# Altium PCB PCB.PcbDoc
Units mm, origin at the board's own origin, x right, y up, seen from the top; angles counter-clockwise.
Board outline 100 x 100 mm, 4 copper layers (Top Layer, Layer2, Layer3, Bottom Layer), stack 1.482 mm thick; 33 components, 28 nets, 172 pads, 8 vias.
Unrouted connection lines stored in the file: 71.
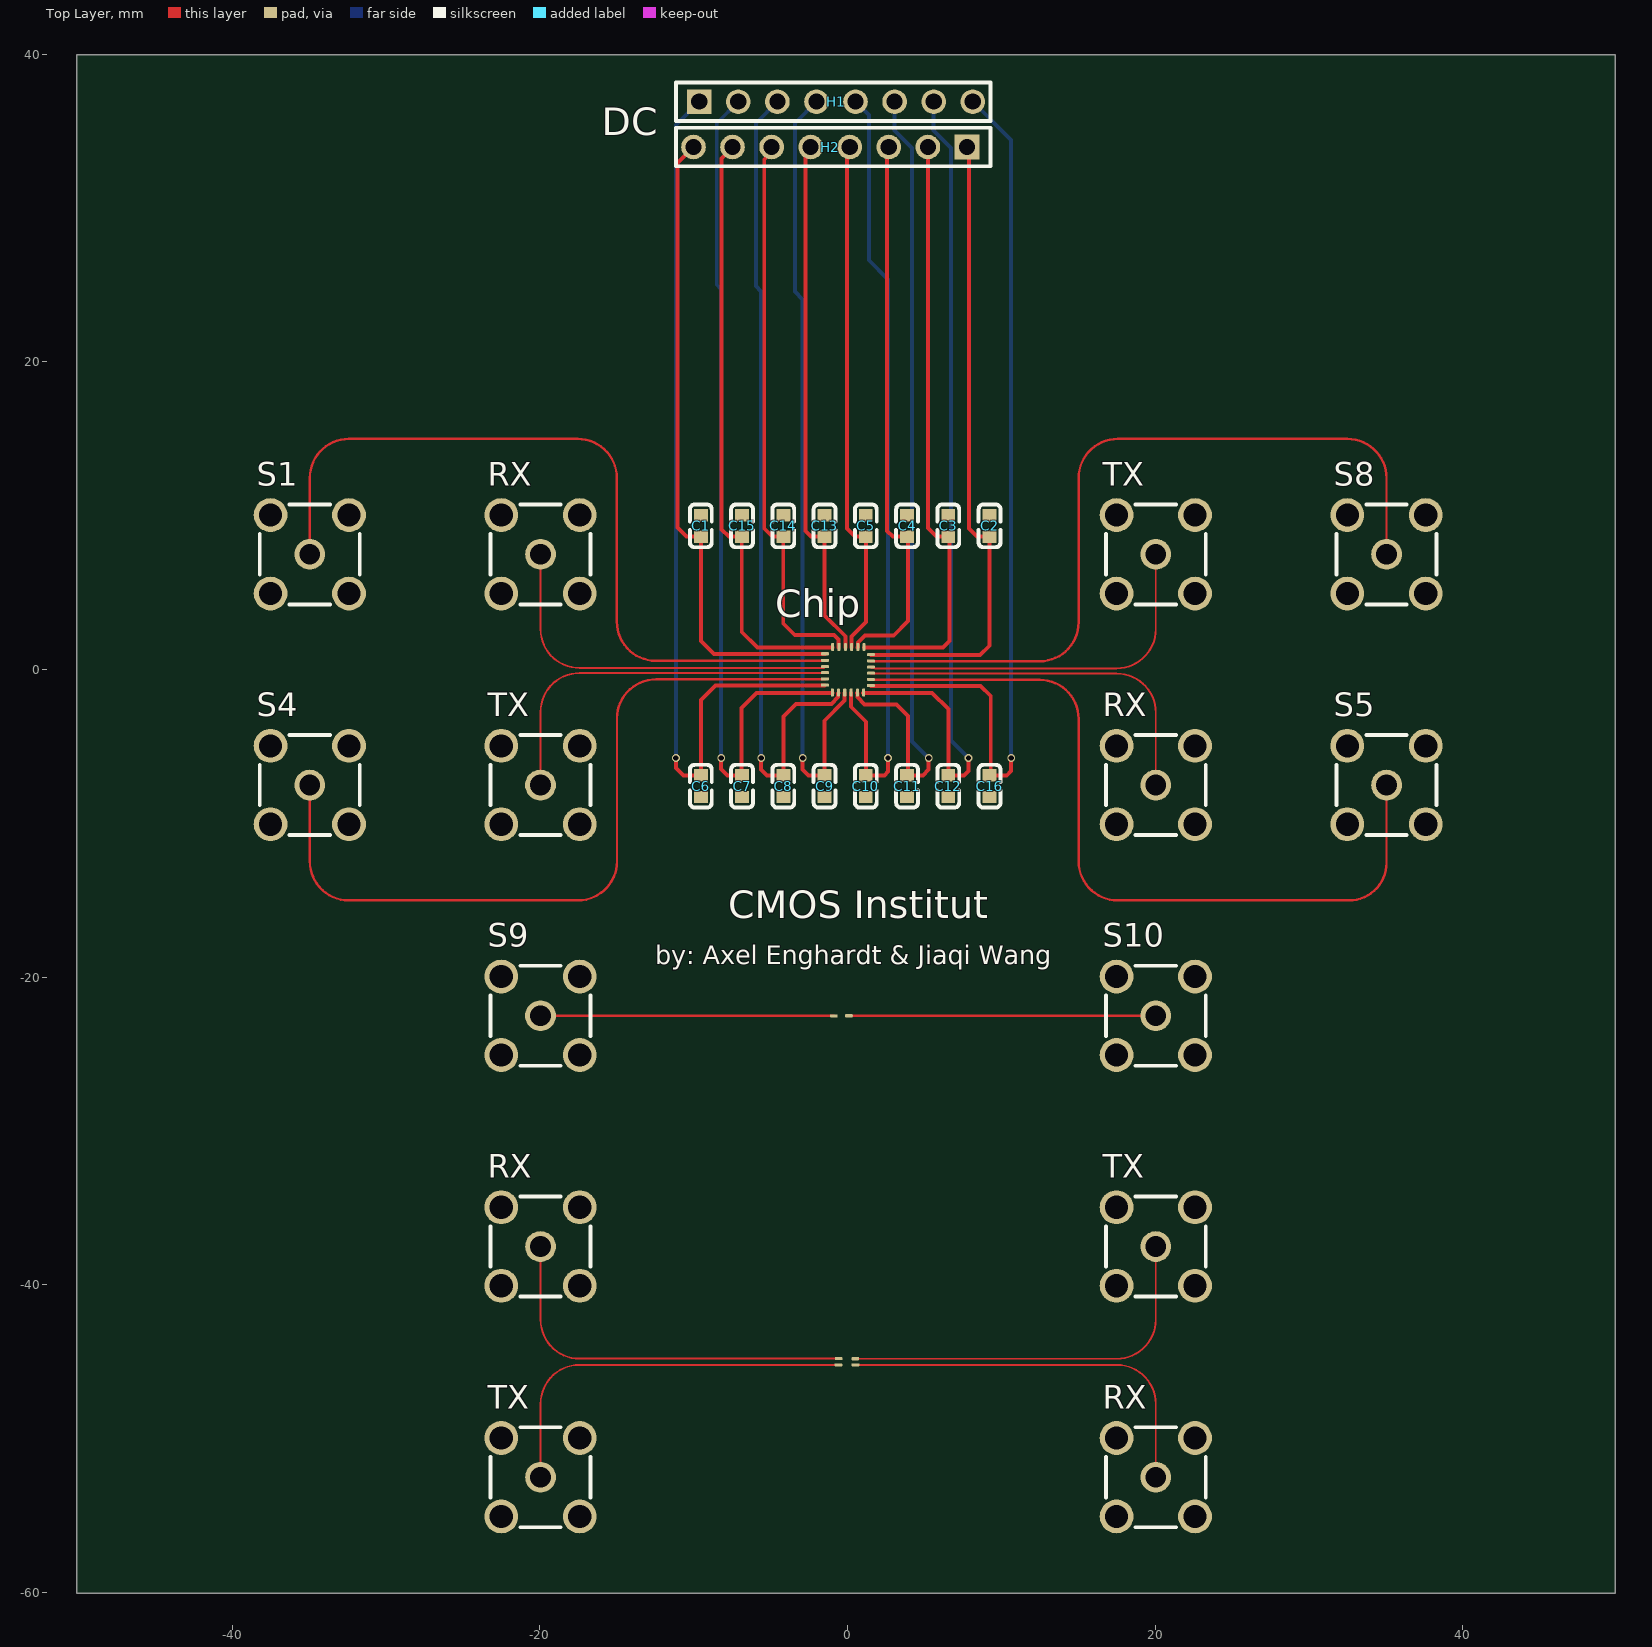
[diagram p0: Top Layer view]
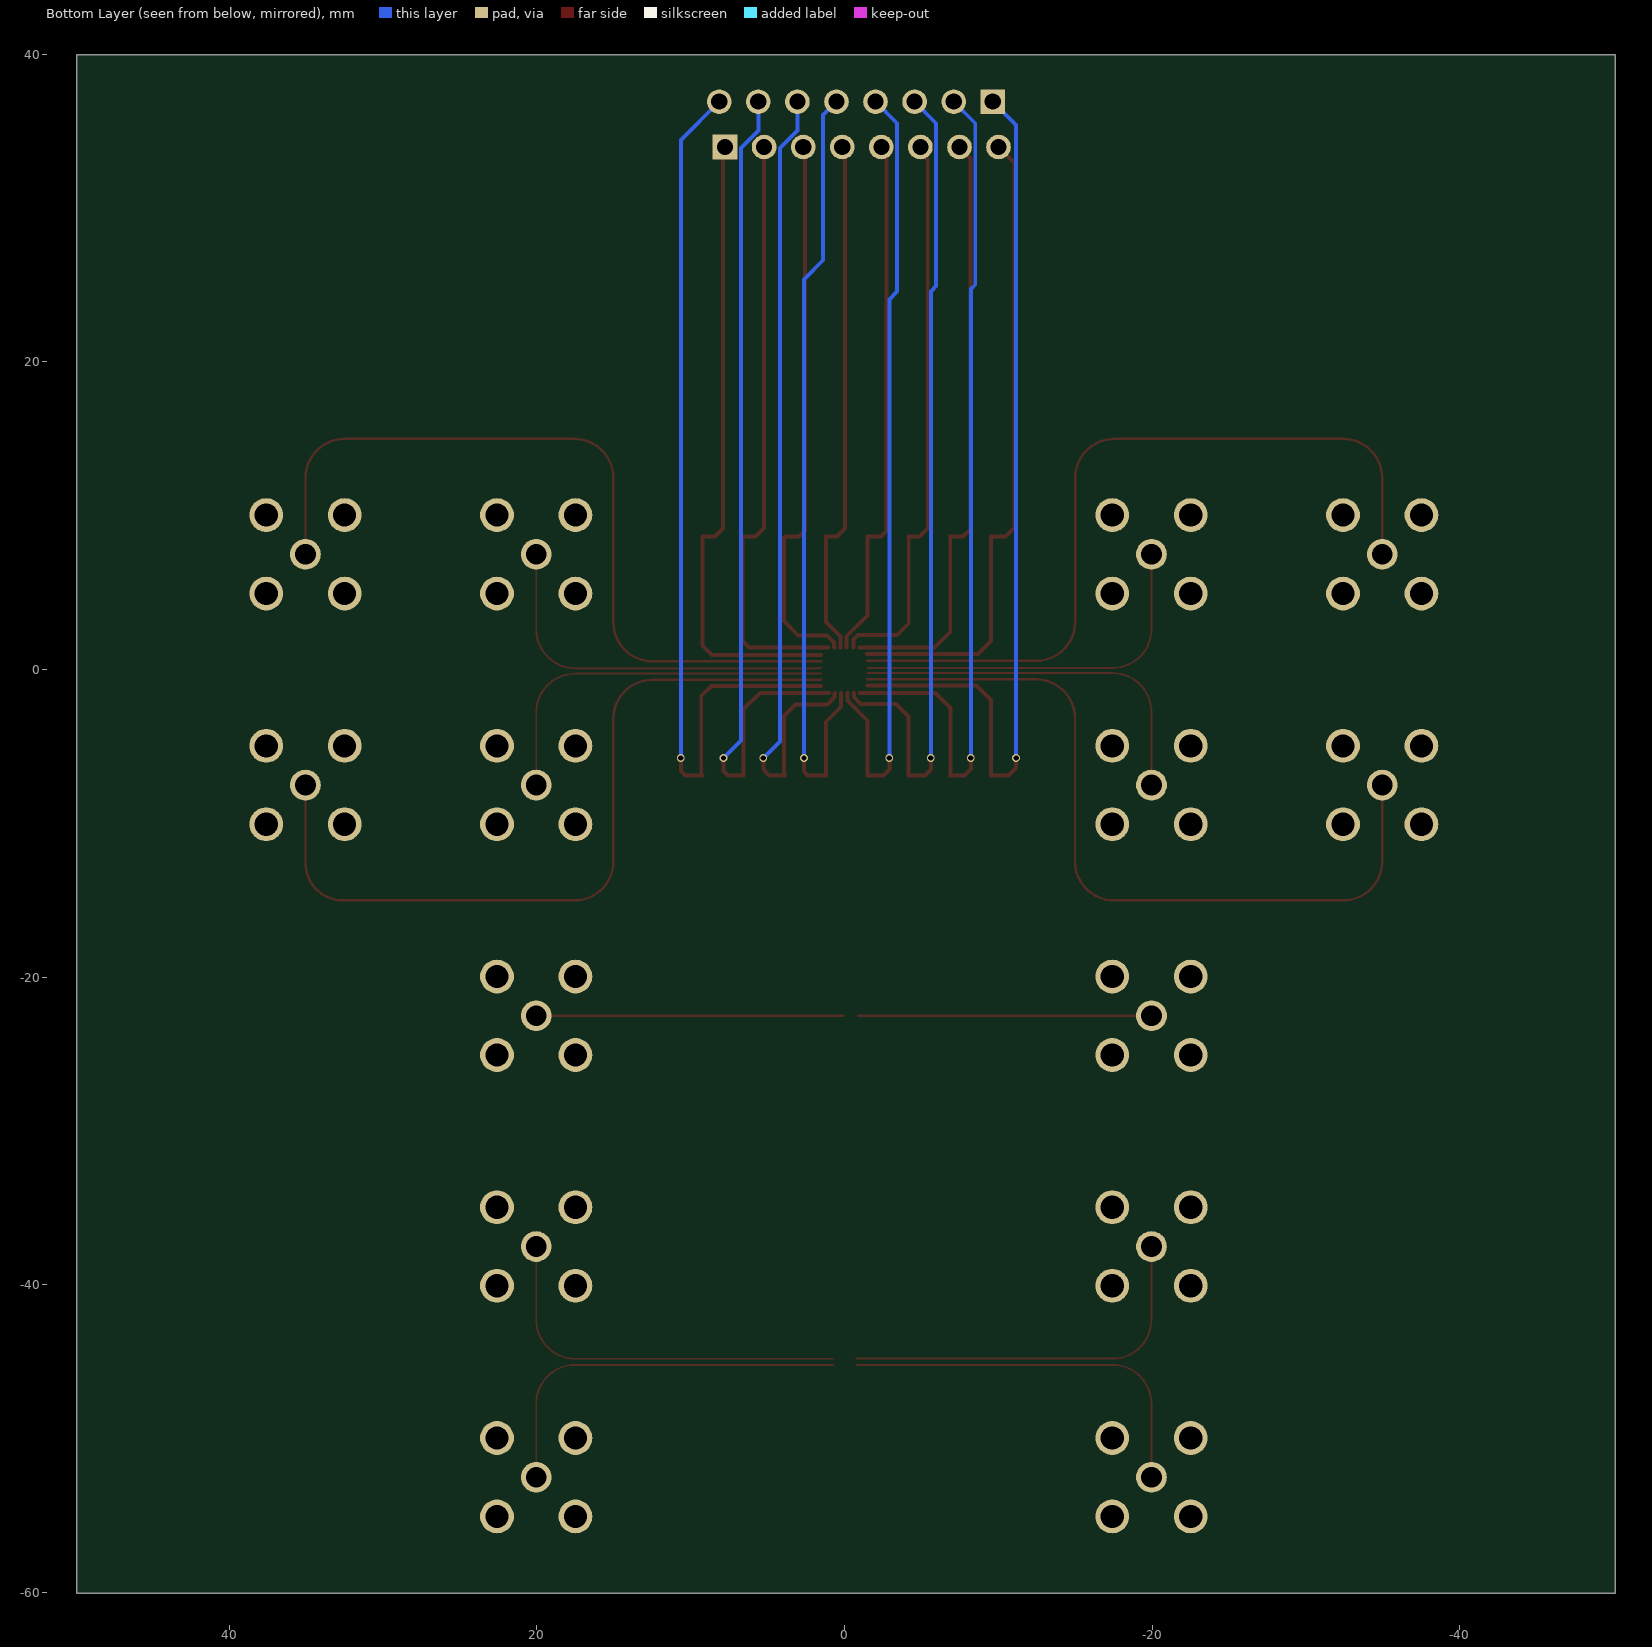
[diagram p1: Bottom Layer view, seen from below]
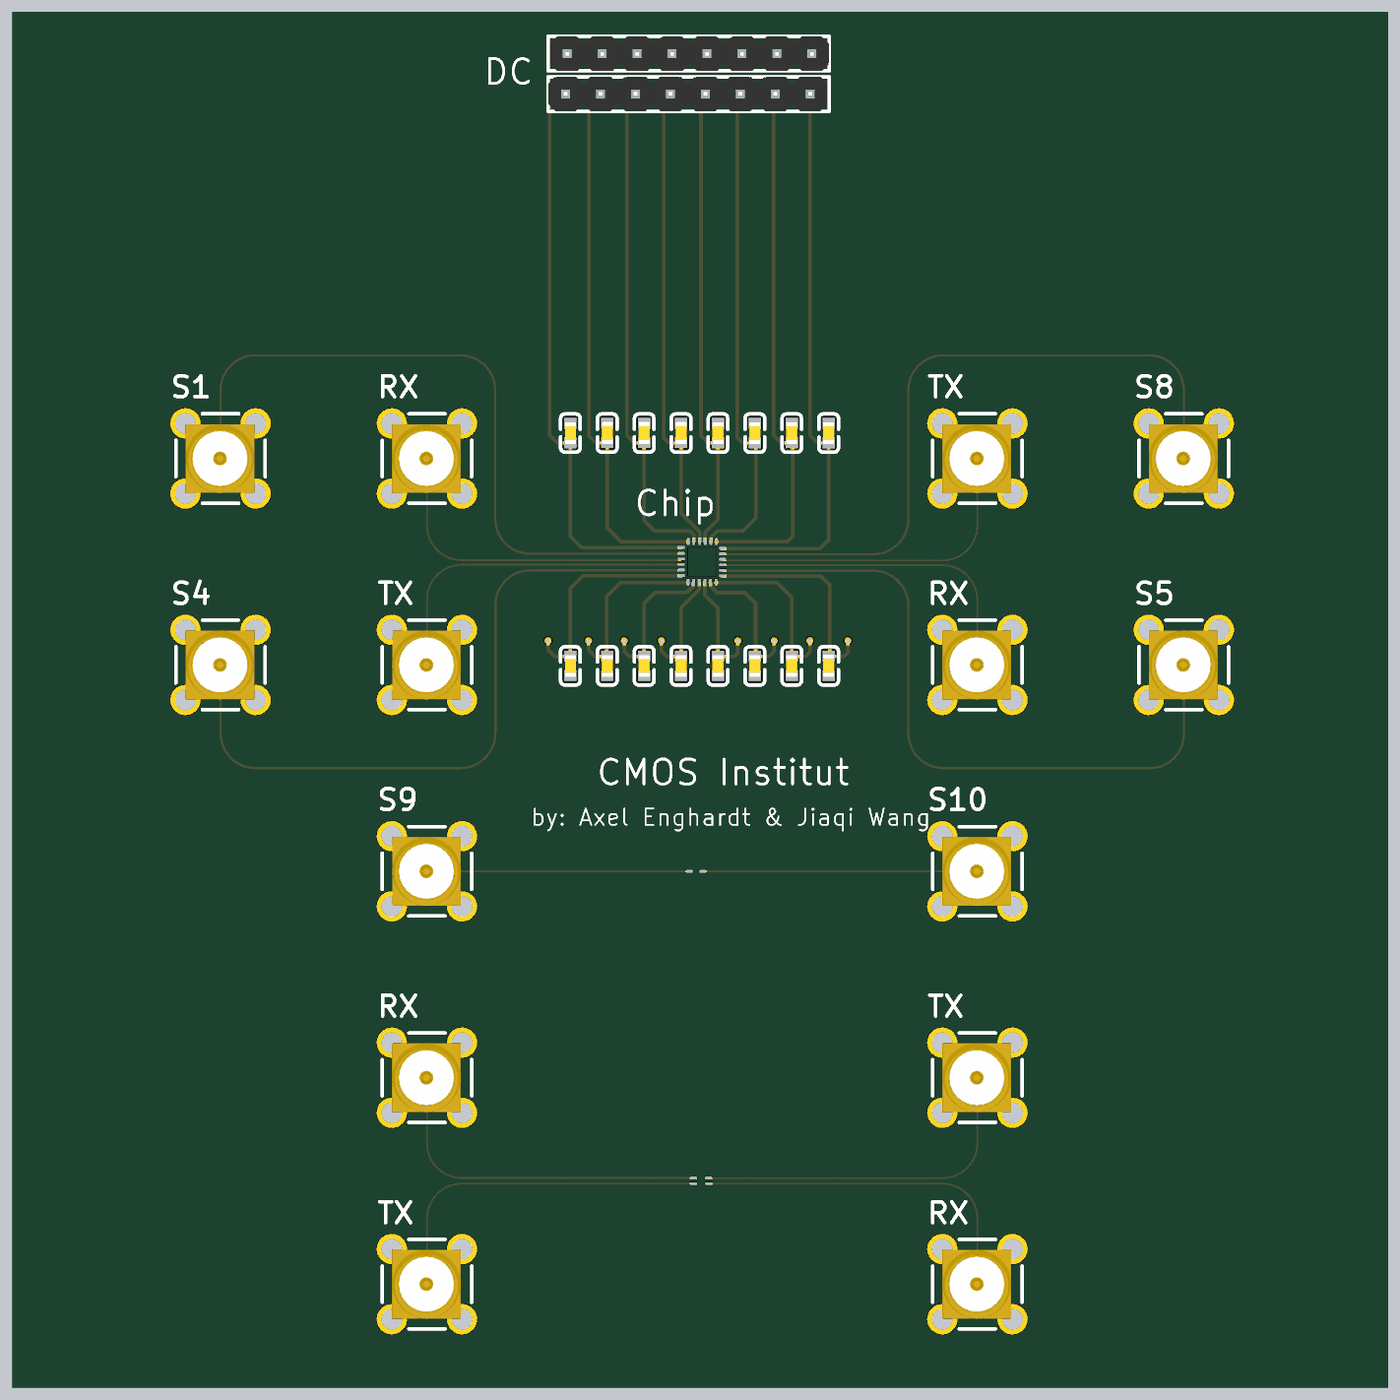
[diagram p2: 3D render of the assembled board from above, using the file's embedded part models]

## Layer stack, top to bottom
Top Solder: solder mask 0.035, Solder Resist, Dk 3.5
Top Layer: signal copper 0.168
Dielectric 2: prepreg 0.018, PP-006, Dk 4.1
Layer2: signal copper 0.2
Dielectric 1: dielectric 0.71, FR-4, Dk 4.8
Layer3: signal copper 0.2
Dielectric 3: prepreg 0.018, PP-006, Dk 4.1
Bottom Layer: signal copper 0.168
Bottom Solder: solder mask 0.035, Solder Resist, Dk 3.5

## Board outline
-50.1,-60.038 -50.1,39.962 49.9,39.962 49.9,-60.038

## Design rules (kind name [scope] priority, off if disabled: settings)
Clearance [All] p1: gap=0.1 ignorepadtopadclearanceinfootprint=FALSE
DiffPairsRouting [All] p1: maxlimit=100 minlimit=0.203 mostfreqgap=0.203 toplayer_minwidth=0.01 toplayer_maxwidth=0.124 toplayer_prefwidth=0.124 midlayer1_minwidth=0.01 midlayer1_maxwidth=0.124 midlayer1_prefwidth=0.124 midlayer2_minwidth=0.01 midlayer2_maxwidth=0.124 midlayer2_prefwidth=0.124 bottomlayer_minwidth=0.01 bottomlayer_maxwidth=0.124 bottomlayer_prefwidth=0.124 maxuncoupledlength=12.7
MinimumSolderMaskSliver [All] p1: minsoldermaskwidth=0.1
PolygonConnect [All] p1: connectstyle=Relief reliefconductorwidth=0.254 reliefentries=4 polygonreliefangle="90 Angle" airgapwidth=0.254
RoutingVias [All] p1: holewidth=0.711 width=1.27 viastyle="Through Hole" minholewidth=0.2 minwidth=0.4 maxholewidth=0.711 maxwidth=1.27
SilkToSolderMaskClearance [IsPad] p1: minsilkscreentomaskgap=0.1 clearancetoexposedcopper=TRUE
SolderMaskExpansion [All] p1: expansion=0.102 istentingtop=FALSE
SupplyNets "Schematic Supply Nets" [InNet('GND')] p1: voltage=0.000
Width RF [InNetClass('RF')] p1: maxlimit=0.156 minlimit=0.156 preferedwidth=0.156
Width [All] p2: maxlimit=0.254 minlimit=0.254 preferedwidth=0.254
27 further rules are at their usual default settings.

## Classes and differential pairs
net class RF: NetS9_5 RF1 RF2 RF3 RF4
component class sheet1: C1 C2 C3 C4 C5 C6 C7 C8 C9 C10 C11 C12 C13 C14 C15 C16 Chip H1 H2 RX S1 S4 S5 S8 S9 S10 TX
differential pair RF: +RF_P -RF_N
differential pair RF2: +RF2_P -RF2_N
differential pair RF1: +RF1_P -RF1_N

## Components (designator, comment, footprint, x,y, rotation, side; value= is the part's Value field where it differs from the comment)
C1 "C0603" C0603 -9.537,9.352 r90 top
C2 "C0603" C0603 9.233,9.352 r90 top
C3 "C0603" C0603 6.552,9.352 r90 top
C4 "C0603" C0603 3.87,9.352 r90 top
C5 "C0603" C0603 1.189,9.352 r90 top
C6 "C0603" C0603 -9.537,-7.568 r90 top
C7 "C0603" C0603 -6.856,-7.568 r90 top
C8 "C0603" C0603 -4.174,-7.568 r90 top
C9 "C0603" C0603 -1.493,-7.568 r90 top
C10 "C0603" C0603 1.189,-7.568 r90 top
C11 "C0603" C0603 3.87,-7.568 r90 top
C12 "C0603" C0603 6.552,-7.568 r90 top
C13 "C0603" C0603 -1.493,9.332 r270 top
C14 "C0603" C0603 -4.174,9.332 r270 top
C15 "C0603" C0603 -6.856,9.332 r270 top
C16 "C0603" C0603 9.233,-7.588 r270 top
Chip "2mm_24p" 2MM_8AC_16DC 3.065,-0.017 r0 top (schematic designator U1)
H1 "8P" 8P -0.75,36.541 r0 top
H2 "8P" 8P -1.127,34.353 r180 top
RX "BWSMA" BWSMA 20.04,-52.506 r0 top (schematic designator S14)
RX "BWSMA" BWSMA -19.96,-37.506 r0 top (schematic designator S11)
RX "BWSMA" BWSMA 20.04,-7.506 r0 top (schematic designator S6)
RX "BWSMA" BWSMA -19.96,7.494 r0 top (schematic designator S2)
S1 "BWSMA" BWSMA -34.96,7.494 r0 top
S4 "BWSMA" BWSMA -34.96,-7.506 r0 top
S5 "BWSMA" BWSMA 35.04,-7.506 r0 top
S8 "BWSMA" BWSMA 35.04,7.494 r0 top
S9 "BWSMA" BWSMA -19.96,-22.506 r0 top
S10 "BWSMA" BWSMA 20.04,-22.506 r0 top
TX "BWSMA" BWSMA -19.96,-52.506 r0 top (schematic designator S13)
TX "BWSMA" BWSMA 20.04,-37.506 r0 top (schematic designator S12)
TX "BWSMA" BWSMA 20.04,7.494 r0 top (schematic designator S7)
TX "BWSMA" BWSMA -19.96,-7.506 r0 top (schematic designator S3)

## Footprints (in the part's own frame and the unit in brackets; to place one, negate y for a bottom-side part, rotate by r counter-clockwise, add the part's x,y. Pads: shape width x height; smd on the part's side, far side on the other; paste and mask are expansions set on the pad)
2MM_8AC_16DC [mm]
  rrect50% 0.5x0.2 smd mask+0.05: 1(-4.528,1.046) 2(-4.53,0.614) 3(-4.53,0.214) 4(-4.53,-0.186) 5(-4.53,-0.586) 6(-4.53,-0.989) 13(-1.543,-1.018) 14(-1.543,-0.618) 15(-1.543,-0.218) 16(-1.543,0.182) 17(-1.543,0.583) 18(-1.543,0.988)
  rect 0.1x0.05 on Mech16 mask+0.102: 1(-3.935,0.706) 2(-3.933,0.406) 3(-3.933,0.056) 4(-3.933,-0.044) 5(-3.933,-0.394) 6(-3.933,-0.694) 13(-2.133,-0.694) 14(-2.133,-0.394) 15(-2.133,-0.044) 16(-2.133,0.056) 17(-2.133,0.406) 18(-2.133,0.706)
  rrect50% 0.2x0.5 smd mask+0.05: 7(-4.052,-1.475) 8(-3.651,-1.475) 9(-3.246,-1.475) 10(-2.832,-1.475) 11(-2.421,-1.475) 12(-2.019,-1.475) 19(-1.996,1.483) 20(-2.396,1.483) 21(-2.796,1.483) 22(-3.196,1.483) 23(-3.628,1.483) 24(-4.032,1.483)
  rect 0.05x0.1 on Mech16 mask+0.102: 7(-3.733,-0.894) 8(-3.433,-0.894) 9(-3.083,-0.894) 10(-2.983,-0.894) 11(-2.633,-0.894) 12(-2.333,-0.894) 19(-2.333,0.906) 20(-2.633,0.906) 21(-2.983,0.906) 22(-3.083,0.906) 23(-3.433,0.906) 24(-3.733,0.906)
  body extent -4.03,-0.99 -2.03,1.01, height 0.5
8P [mm]
  rect 1.6x1.6 hole 1.05: 1(-8.89,0.381)
  round 1.6 hole 1.05: 2(-6.35,0.381) 3(-3.81,0.381) 4(-1.27,0.381) 5(1.27,0.381) 6(3.81,0.381) 7(6.35,0.381) 8(8.89,0.381)
  silkscreen extent -10.41,-0.87 10.03,1.63, body extent -10.27,-0.89 10.01,1.61, height 8.6
BWSMA [mm]
  round 2.2 hole 1.5 paste-2539.97 mask+0.051: 1(-2.55,-2.55) 2(-2.55,2.55) 3(2.55,2.55)
  round 2.2 hole 1.5 copper offset 0,0 paste-2539.97 mask+0.051: 4(2.55,-2.55)
  round 2 hole 1.35 paste-2539.97 mask+0.051: 5(0,0)
  silkscreen extent -3.25,-3.25 3.25,3.25, body extent -2.54,-2.5 2.46,2.5, height 8
C0603 [mm]
  rect 0.8x0.9 smd: 1(-0.71,0) 2(0.69,0)
  silkscreen extent -1.4,-0.71 1.38,0.71, body extent -0.82,-0.4 0.78,0.4, height 0.5

## Free pads (board coordinates)
  rrect50% 0.5x0.2 smd mask+0.05: 2(-0.889,-22.507) 3(0.089,-22.503) 4(-0.578,-44.798) 4(0.508,-44.801) 4(0.519,-45.201) 5(-0.593,-45.2)

## Via types
v1: diameter 0.5, hole 0.35, Top Layer to Bottom Layer, 8 vias

## Nets (pads, with @x,y where several pads share a name; then routed paths per layer and width w, separated by ;. In a path a pad name is that pad's centre, name@x,y a point inside that pad or via, vN(x,y) a via of type N, cw(c..) or ccw(c..) an arc to the next point about the centre after c; other vN are vias at no path point)
DC1: C1.1 Chip.1 H2.8 | length 42.1
  Top Layer w0.254: H2.8 -11.051,32.938 -11.051,9.226 -10.467,8.642 C1.1 -9.537,1.852 -8.687,1.002 Chip.1@-1.477,1.002
DC9: C16.1 Chip.13 H1.8 | length 59.3
  Top Layer w0.254: Chip.13@1.508,-1.062 8.647,-1.062 9.313,-1.728 9.313,-6.798 C16.1 10.353,-6.878 10.633,-6.598 v1(10.633,-5.748)
  Bottom Layer w0.254: H1.8 10.633,34.429 v1(10.633,-5.748)
GND: C1.2 C2.2 C3.2 C4.2 C5.2 C6.1 C7.1 C8.1 C9.1 C10.1 C11.1 C12.1 C13.1 C14.1 C15.1 C16.2 RX.1 RX.2 RX.3 RX.4 S1.1 S1.2 S1.3 S1.4 S4.1 S4.2 S4.3 S4.4 S5.1 S5.2 S5.3 S5.4 S8.1 S8.2 S8.3 S8.4 S9.1 S9.2 S9.3 S9.4 S10.1 S10.2 S10.3 S10.4 TX.1 TX.2 TX.3 TX.4
NetC2_1: C2.1 Chip.18 H2.1 | length 41.5
  Top Layer w0.254: Chip.18@1.508,0.938 8.619,0.938 9.233,1.552 C2.1 8.423,8.642 7.893,9.172 7.893,33.842 H2.1
NetC3_1: C3.1 Chip.19 H2.2 | length 38.9
  Top Layer w0.254: Chip.19@1.055,1.439 6.211,1.439 6.623,1.852 6.623,8.57 C3.1 5.773,8.642 5.223,9.192 H2.2
NetC4_1: C4.1 Chip.20 H2.3 | length 36.1
  Top Layer w0.254: Chip.20@0.655,1.439 0.682,1.466 0.682,1.759 1.145,2.222 3.003,2.222 3.933,3.152 3.933,8.579 C4.1 2.953,8.642 2.573,9.022 2.573,33.862 H2.3
NetC5_1: C5.1 Chip.21 H2.4 | length 33.8
  Top Layer w0.254: H2.4@-0.047,33.714 -0.047,9.172 0.483,8.642 C5.1 1.189,3.088 0.255,2.154 Chip.21@0.255,1.439 ; H2.4 H2.4@0.283,33.832
NetC6_2: C6.2 Chip.6 H1.1 | length 59.1
  Top Layer w0.254: v1@-11.157,-5.768 -11.156,-5.769 -11.156,-6.399 -10.677,-6.878 C6.2 -9.537,-1.978 -8.591,-1.032 Chip.6@-1.479,-1.032
  Bottom Layer w0.254: v1(-11.157,-5.748) -11.157,35.405 H1.1
NetC7_2: C7.2 Chip.7 H1.2 | length 56.3
  Top Layer w0.254: v1@-8.217,-5.788 -8.217,-6.458 -7.797,-6.878 C7.2 -6.897,-6.837 -6.897,-2.508 -5.907,-1.518 Chip.7@-0.985,-1.518
  Bottom Layer w0.254: v1(-8.217,-5.748) -8.217,24.732 -8.504,25.019 -8.504,35.518 H1.2
NetC8_2: C8.2 Chip.8 H1.3 | length 53.9
  Top Layer w0.254: v1(-5.617,-5.748) -5.617,-6.508 -5.247,-6.878 C8.2 -4.174,-3.045 -3.357,-2.228 -1.054,-2.228 -0.612,-1.787 -0.612,-1.546 Chip.8@-0.585,-1.519
  Bottom Layer w0.254: v1(-5.617,-5.748) -5.617,24.592 -5.964,24.939 -5.964,35.518 H1.3
NetC9_2: C9.2 Chip.9 H1.4 | length 51.6
  Top Layer w0.254: v1@-2.917,-5.808 -2.917,-6.508 -2.547,-6.878 C9.2 -1.493,-3.324 -0.185,-2.017 Chip.9@-0.185,-1.519
  Bottom Layer w0.254: v1(-2.917,-5.748) -2.917,24.062 -3.424,24.569 -3.424,35.518 H1.4
NetC10_2: C10.2 Chip.10 H1.5 | length 51.5
  Top Layer w0.254: Chip.10@0.213,-1.518 0.213,-2.419 1.189,-3.394 C10.2 2.393,-6.878 2.633,-6.638 v1@2.633,-5.948
  Bottom Layer w0.254: H1.5 1.383,36.059 1.383,26.612 2.633,25.362 v1(2.633,-5.748)
NetC11_2: C11.2 Chip.11 H1.6 | length 53.6
  Top Layer w0.254: Chip.11@0.615,-1.519 0.642,-1.546 0.642,-1.788 1.112,-2.258 3.173,-2.258 3.923,-3.008 3.923,-6.825 C11.2 4.893,-6.878 5.273,-6.498 v1@5.273,-5.988
  Bottom Layer w0.254: H1.6 3.06,35.047 4.196,33.911 4.196,-4.671 v1(5.273,-5.748)
NetC12_2: C12.2 Chip.12 H1.7 | length 56.2
  Top Layer w0.254: Chip.12@1.015,-1.519 5.504,-1.519 6.552,-2.567 C12.2 7.573,-6.878 7.863,-6.588 v1(7.863,-5.748)
  Bottom Layer w0.254: H1.7 5.6,35.047 6.736,33.911 6.736,-4.621 v1(7.863,-5.748)
NetC13_2: C13.2 Chip.22 H2.5 | length 34.3
  Top Layer w0.254: H2.5 -2.397,33.608 -2.743,33.262 -2.743,9.018 -2.367,8.642 C13.2 -1.493,3.518 -0.145,2.17 Chip.22@-0.145,1.439
NetC14_2: C14.2 Chip.23 H2.6 | length 36.6
  Top Layer w0.254: H2.6 -4.937,33.63 -5.417,33.15 -5.417,9.182 -4.877,8.642 C14.2 -4.177,8.639 -4.177,2.992 -3.433,2.248 -0.873,2.248 -0.577,1.952 Chip.23@-0.577,1.441
NetC15_2: C15.2 Chip.24 H2.7 | length 39.2
  Top Layer w0.254: H2.7 -7.477,33.941 -8.192,33.227 -8.192,9.116 -7.717,8.642 C15.2 -6.877,8.62 -6.877,2.452 -5.866,1.441 Chip.24@-0.976,1.441
NetS9_5: pad.2 pad.3 S9.5 S10.5 | length 39
  Top Layer w0.156: S9.5 pad.2 pad.2 ; pad.3 20.037,-22.503 S10.5
RF1: Chip.2 S1.5 | length 52.1
  Top Layer w0.156: S1.5 -34.96,12.454 cw(c-32.42,12.454) -32.42,14.994 -32.408,14.994 -17.537,14.994 cw(c-17.537,12.454) -14.997,12.454 -14.997,3.11 ccw(c-12.457,3.11) -12.457,0.57 Chip.2@-1.479,0.57
RF1_N: Chip.4 TX.5@-19.961,-7.505 | length 24.7
  Top Layer w0.124: TX.5@-19.961,-7.505 -19.961,-2.761 cw(c-17.421,-2.761) -17.421,-0.221 -17.357,-0.221 Chip.4@-1.488,-0.221
RF1_P: Chip.3 RX.5@-19.96,7.494 | length 24.7
  Top Layer w0.124: RX.5@-19.96,7.494 -19.96,2.634 ccw(c-17.433,2.634) -17.433,0.106 Chip.3@-1.543,0.106
RF2: Chip.5 S4.5 | length 52.1
  Top Layer w0.156: S4.5 -34.96,-12.466 ccw(c-32.42,-12.466) -32.42,-15.006 -32.321,-15.006 -17.527,-15.006 ccw(c-17.527,-12.466) -14.987,-12.466 -14.987,-3.17 cw(c-12.447,-3.17) -12.447,-0.63 Chip.5@-1.479,-0.63
RF2_N: Chip.15 RX.5@20.04,-7.506 | length 24.7
  Top Layer w0.124: Chip.15@1.512,-0.258 17.5,-0.258 cw(c17.5,-2.798) 20.04,-2.798 RX.5@20.04,-7.506
RF2_P: Chip.16 TX.5@20.04,7.494 | length 24.9
  Top Layer w0.124: Chip.16@1.508,0.138 1.546,0.1 1.752,0.1 1.769,0.083 17.5,0.083 ccw(c17.5,2.622) 20.04,2.622 TX.5@20.04,7.494
RF3: Chip.14 S5.5 | length 52.1
  Top Layer w0.156: Chip.14@1.508,-0.662 12.483,-0.662 cw(c12.483,-3.202) 15.023,-3.202 15.023,-12.466 ccw(c17.563,-12.466) 17.563,-15.006 32.595,-15.006 ccw(c32.595,-12.561) 35.039,-12.561 S5.5
RF4: Chip.17 S8.5 | length 52.2
  Top Layer w0.156: Chip.17@1.509,0.539 12.483,0.539 ccw(c12.483,3.079) 15.023,3.079 15.023,12.454 cw(c17.563,12.454) 17.563,14.994 32.5,14.994 cw(c32.5,12.454) 35.04,12.454 S8.5
RF_N: pad.4@0.519,-45.201 pad.5 RX.5@20.04,-52.506 TX.5@-19.96,-52.506 | length 50.9
  Top Layer w0.124: TX.5@-19.96,-52.506 -19.96,-47.74 cw(c-17.42,-47.74) -17.42,-45.2 -17.3,-45.2 pad.5@-0.809,-45.2 ; pad.4@0.744,-45.201 17.3,-45.201 17.5,-45.201 cw(c17.5,-47.741) 20.04,-47.741 RX.5@20.04,-52.506
RF_P: pad.4@0.508,-44.801 pad.4@-0.578,-44.798 RX.5@-19.96,-37.506 TX.5@20.04,-37.506 | length 50.9
  Top Layer w0.124: RX.5@-19.96,-37.506 -19.96,-42.258 ccw(c-17.42,-42.258) -17.42,-44.798 -17.3,-44.798 pad.4@-0.784,-44.798 ; pad.4@0.739,-44.801 17.3,-44.801 17.5,-44.801 ccw(c17.5,-42.261) 20.04,-42.261 TX.5@20.04,-37.506

## Silkscreen, mask and mechanical layers (free items; w line width, h text height)
Top Overlay:
  text "DC" at -15.966,34.741 h1.8
  text "CMOS Institut" at -7.749,-16.163 h1.8
  text "by: Axel Enghardt & Jiaqi Wang" at -12.501,-19.141 h1.2
Mechanical 1:
  the board outline again, w0.254
Top Wire Bonding:
  lines w0.025 net NetS9_5: -0.814,-22.513 0.04,-22.506
  lines w0.025 net RF_N: -0.464,-45.209 0.377,-45.209
  lines w0.025 net RF_P: -0.449,-44.811 0.375,-44.816